# Altium PCB Brushless_driver_FOC_AbsoluteEncoder_V1.PcbDoc
Units mil, origin at the board's own origin, x right, y up, seen from the top; angles counter-clockwise.
Board outline 3400 x 2250 mil, 2 copper layers (Top Layer, Bottom Layer); 91 components, 80 nets, 374 pads, 422 vias.
Unrouted connection lines stored in the file: 70.
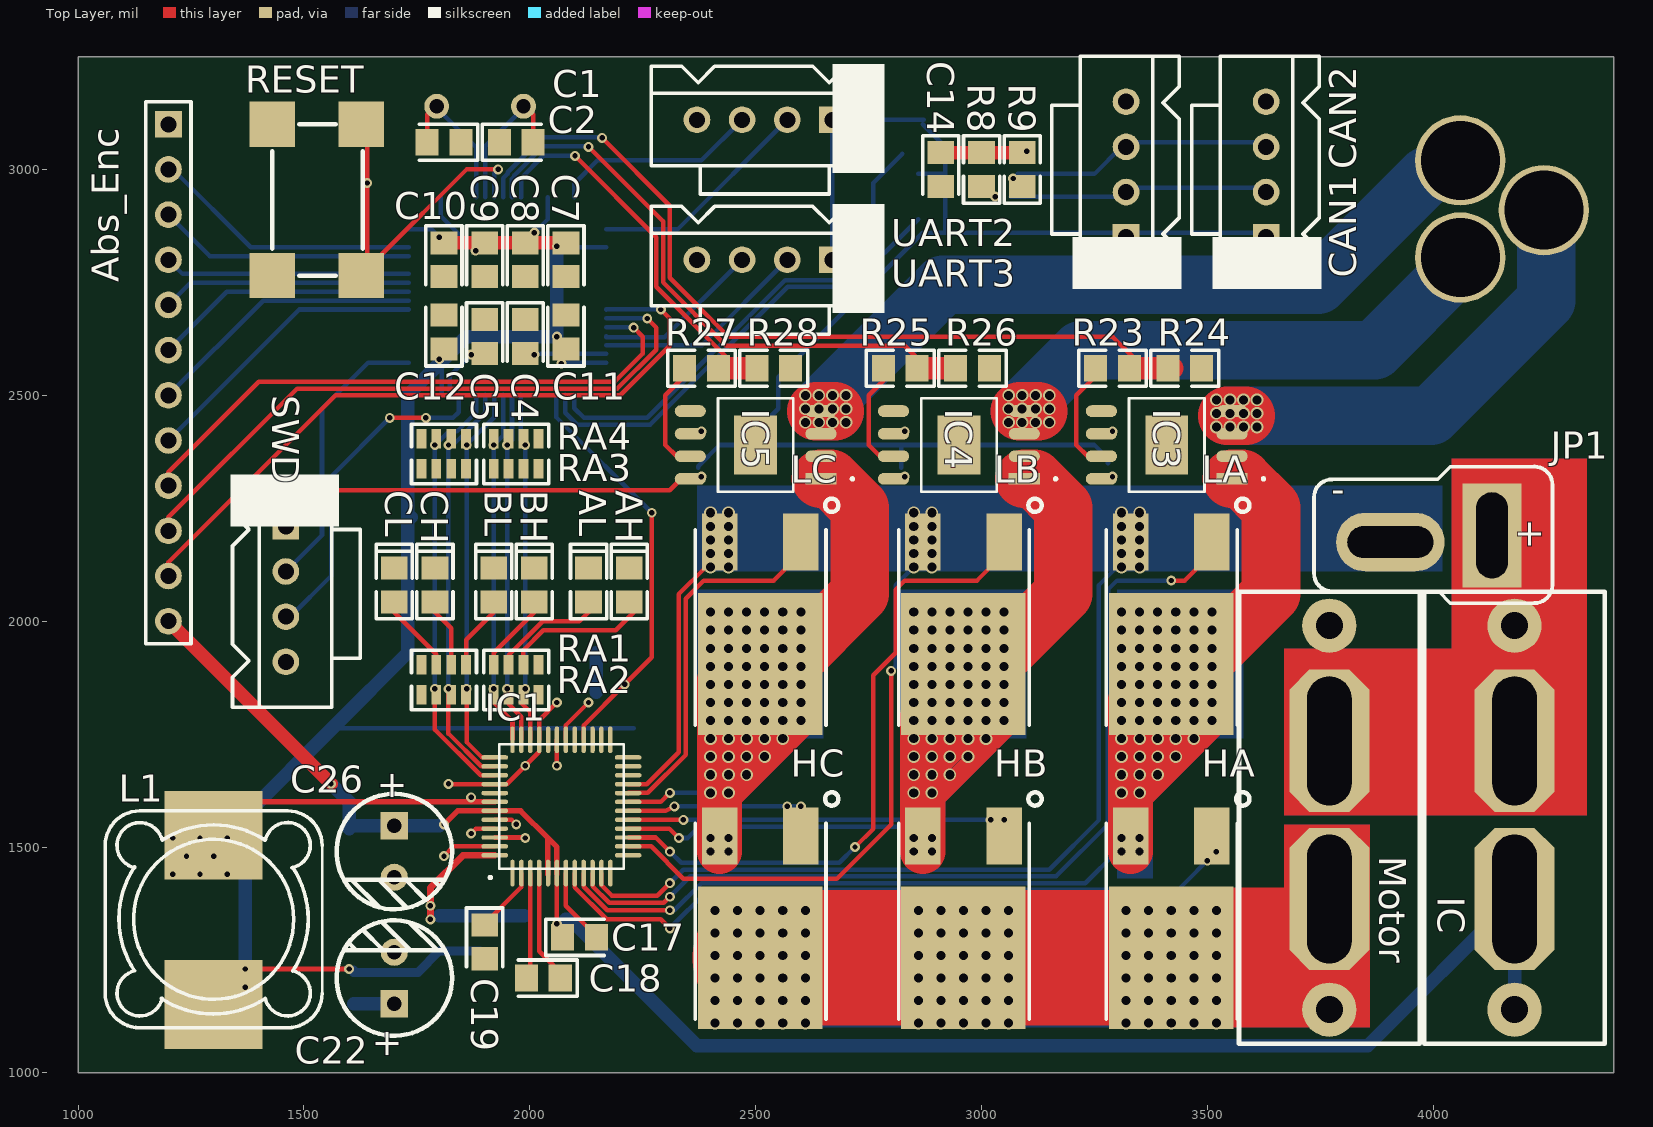
[diagram p0: Top Layer view]
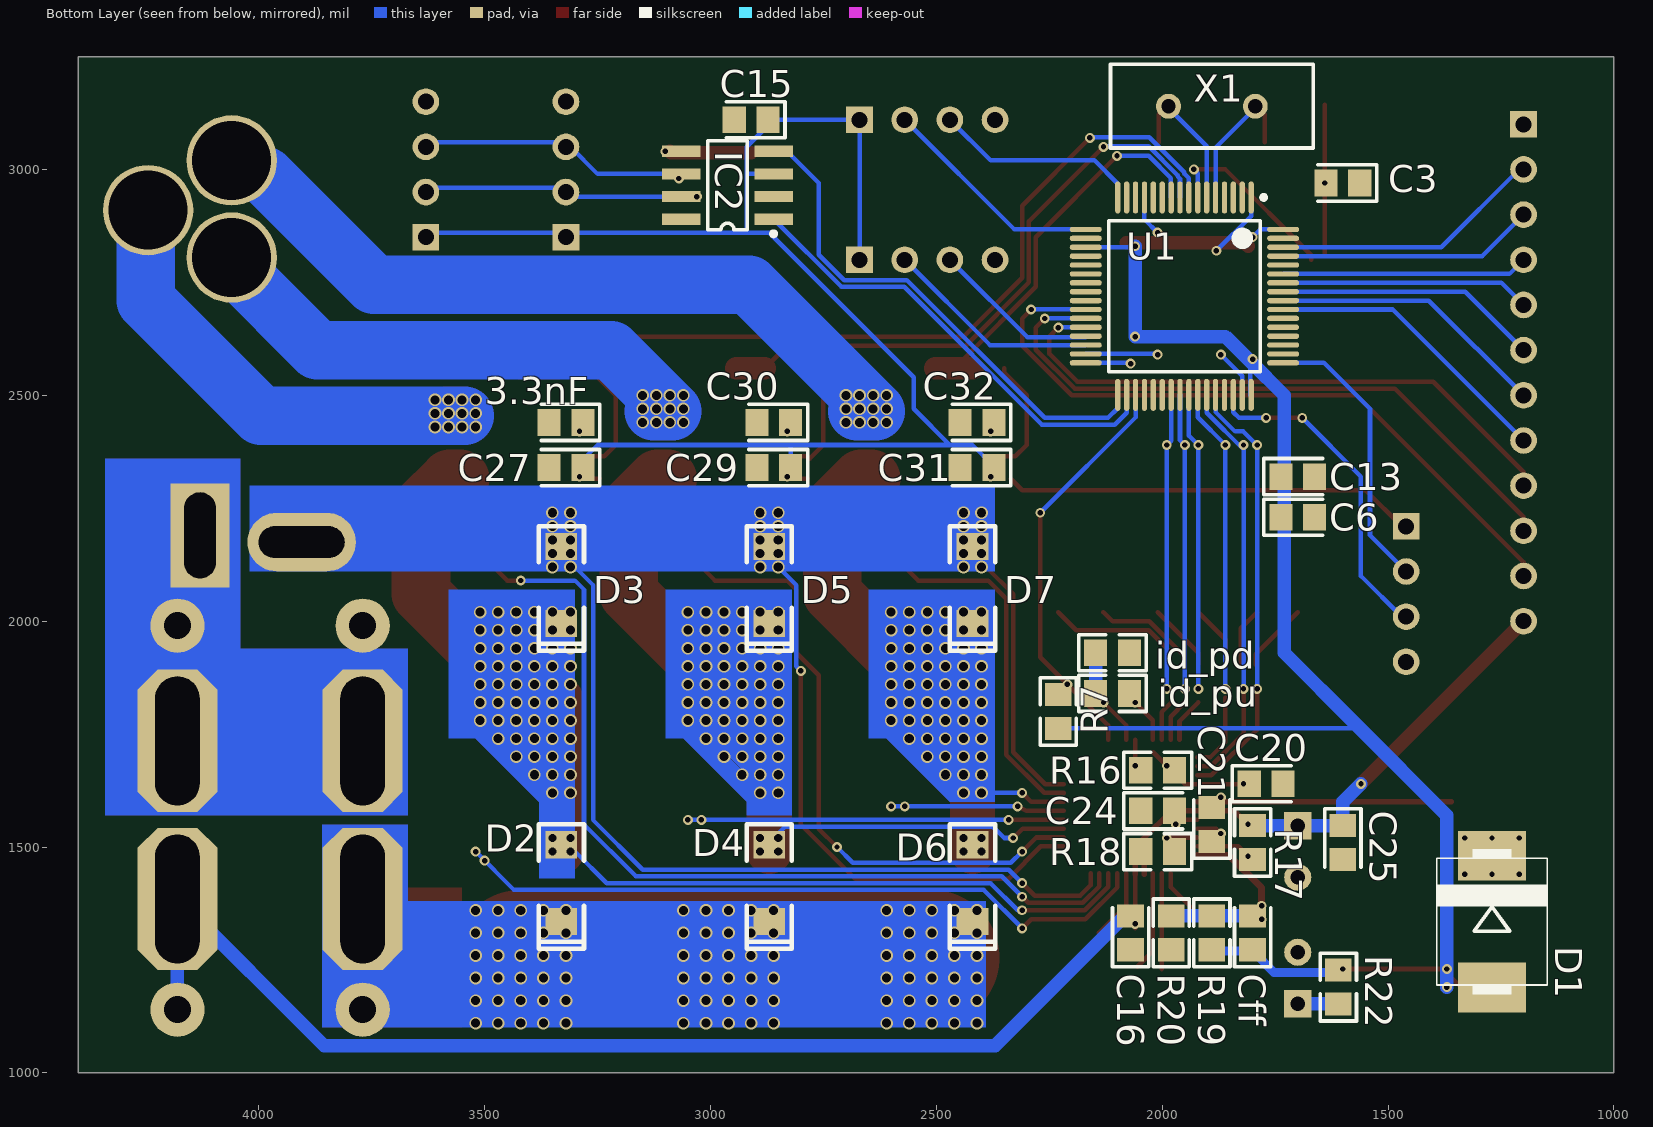
[diagram p1: Bottom Layer view, seen from below]

## Layer stack, top to bottom
Top Solder: solder mask 0.4, Solder Resist, Dk 3.5
Top Layer: signal copper 1.4
Dielectric 1: dielectric 12.6, FR-4, Dk 4.8
Bottom Layer: signal copper 1.4
Bottom Solder: solder mask 0.4, Solder Resist, Dk 3.5

## Board outline
4400,1000 4400,3250 1000,3250 1000,1000 4400,1000

## Design rules (kind name [scope] priority, off if disabled: settings)
AssemblyTestPointUsage [All] p1 off:
AssemblyTestpoint [All] p1 off: testpointundercomponent=TRUE minsize=40 maxsize=100 preferedsize=60 minholesize=0 maxholesize=40 preferedholesize=32 testpointgrid=1 usegrid=TRUE gridtolerance=0.01 allowsidetop=TRUE allowsidebottom=TRUE
Clearance [All] p1: gap=5
ComponentClearance [All] p1 off: gap=10 collisioncheckmode=3 verticalgap=10 showdistances=FALSE
DiffPairsRouting [All] p1 off: maxlimit=10 minlimit=10 mostfreqgap=10 toplayer_minwidth=15 toplayer_maxwidth=15 toplayer_prefwidth=15 bottomlayer_minwidth=15 bottomlayer_maxwidth=15 bottomlayer_prefwidth=15 maxuncoupledlength=500
FabricationTestPointUsage [All] p1 off: valid=0 allowmultiple=FALSE
FabricationTestpoint [All] p1 off: side=3 testpointundercomponent=TRUE minsize=40 maxsize=100 preferedsize=60 minholesize=0 maxholesize=40 preferedholesize=32 testpointgrid=1 allowsidetop=TRUE allowsidebottom=TRUE usegrid=TRUE gridtolerance=0.01
FanoutControl Fanout_BGA [IsBGA] p1 off: bgadir=Out bgaviamode=Centered fanoutstyle=Auto fanoutdirection=Alternating viagrid=1 // Fanout_BGA (Default Rule)
FanoutControl Fanout_LCC [IsLCC] p2 off: bgadir=Out bgaviamode=Centered fanoutstyle=Auto fanoutdirection=Alternating viagrid=1 // Fanout_LCC (Default Rule)
FanoutControl Fanout_SOIC [IsSOIC] p3 off: bgadir=Out bgaviamode=Centered fanoutstyle=Auto fanoutdirection=Alternating viagrid=1 // Fanout_SOIC (Default Rule)
FanoutControl Fanout_Small [(CompPinCount < 5)] p4 off: bgadir=Out bgaviamode=Centered fanoutstyle=Auto fanoutdirection=OutThenIn viagrid=1 // Fanout_Small (Default Rule)
FanoutControl Fanout_Default [All] p5 off: bgadir=Out bgaviamode=Centered fanoutstyle=Auto fanoutdirection=Alternating viagrid=1 // Fanout_Default (Default Rule)
Height [All] p1 off: minheight=0 maxheight=1000 prefheight=500
HoleSize [All] p1: absolutevalues=TRUE maxlimit=500 minlimit=1 maxpercent=80.000 minpercent=20.000
HoleToHoleClearance [All] p1 off: gap=10 allowstackedmicrovias=TRUE
LayerPairs [All] p1 off: enforce=TRUE
MinimumSolderMaskSliver [All] p1 off: minsoldermaskwidth=10
PasteMaskExpansion [All] p1 off: expansion=0
PolygonConnect [All] p1: connectstyle=Relief reliefconductorwidth=10 reliefentries=4 polygonreliefangle="90 Angle" airgapwidth=10
RoutingCorners [All] p1: cornerstyle=45-Degree minsetback=0 maxsetback=200
RoutingLayers [All] p1 off: top layer_v5=TRUE bottom layer_v5=TRUE
RoutingPriority [All] p1 off: routingpriority=0
RoutingTopology [All] p1 off: topology=Shortest
RoutingVias [All] p1: holewidth=28 width=50 viastyle="Through Hole" minholewidth=28 minwidth=50 maxholewidth=28 maxwidth=50
SilkToBoardRegionClearance [All] p1 off:
SilkToSilkClearance [All] p1 off: silktosilkclearance=10
SilkToSolderMaskClearance [IsPad] p1 off: minsilkscreentomaskgap=10 clearancetoexposedcopper=TRUE
SolderMaskExpansion [All] p1 off: expansion=4
UnpouredPolygon [All] p1: allowunpoured=FALSE
Width [All] p1: maxlimit=500 minlimit=10 preferedwidth=10
5 further rules are at their usual default settings.

## Components (designator, comment, footprint, x,y, rotation, side; value= is the part's Value field where it differs from the comment)
3.3nF "1nF" CC2012-0805 3320,2440 r0 bottom
Abs_Enc "" HDR1X12 1200,3100 r270 top
AH "" D0805 2220,2080 r90 top
AL "" D0805 2130,2080 r90 top
BH "" D0805 2010,2080 r90 top
BL "" D0805 1920,2080 r90 top
C1 "20pF" CC2012-0805 1810,3060 r180 top
C2 "20pF" CC2012-0805 1970,3060 r0 top
C3 "100nF" CC2012-0805 1600,2970 r0 bottom
C4 "2.2uF" CC2012-0805 1990,2630 r270 top
C5 "2.2uF" CC2012-0805 1900,2630 r270 top
C6 "2.2uF" CC2012-0805 1700,2230 r180 bottom
C7 "100nF" CC2012-0805 2080,2800 r270 top
C8 "100nF" CC2012-0805 1990,2800 r270 top
C9 "100nF" CC2012-0805 1900,2800 r270 top
C10 "100nF" CC2012-0805 1810,2800 r270 top
C11 "100nF" CC2012-0805 2080,2640 r90 top
C12 "100nF" CC2012-0805 1810,2640 r90 top
C13 "100nF" CC2012-0805 1700,2320 r180 bottom
C14 "39pF" CC2012-0805 2910,3000 r270 top
C15 "100nF" CC2012-0805 2910,3110 r0 bottom
C16 "100nF" CC2012-0805 2070,1310 r90 bottom
C17 "1uF" CC2012-0805 2110,1300 r0 top
C18 "47nF" CC2012-0805 2030,1210 r180 top
C19 "1uF" CC2012-0805 1900,1290 r270 top
C20 "1uF" CC2012-0805 1770,1640 r180 bottom
C21 "10nF" CC2012-0805 1890,1550 r90 bottom
C22 "22uF" CAPPR6.4X8 1700,1210 r90 top
C24 "470nF" CC2012-0805 2010,1580 r180 bottom
C25 "100nF" CC2012-0805 1600,1510 r270 bottom
C26 "1uF" CAPPR6.4X8 1700,1490 r270 top
C27 "100nF" CC2012-0805 3320,2340 r0 bottom
C29 "100nF" CC2012-0805 2860,2340 r0 bottom
C30 "3.3nF" CC2012-0805 2860,2440 r0 bottom
C31 "100nF" CC2012-0805 2410,2340 r0 bottom
C32 "3.3nF" CC2012-0805 2410,2440 r0 bottom
CAN1 "" LOCKEDHDR-4 3320,3000 r90 top
CAN2 "" LOCKEDHDR-4 3630,3000 r90 top
Cff ">=5nF" CC2012-0805 1800,1310 r90 bottom
CH "" D0805 1790,2080 r90 top
CL "" D0805 1700,2080 r90 top
D1 "" SMC 1270,1320 r270 bottom
D2 "" SOD-80 3330,1420 r270 bottom
D3 "" SOD-80 3330,2080 r270 bottom
D4 "" SOD-80 2870,1420 r270 bottom
D5 "" SOD-80 2870,2080 r270 bottom
D6 "" SOD-80 2420,1420 r270 bottom
D7 "" SOD-80 2420,2080 r270 bottom
HA "" TO-252AA 3420,1390 r180 top
HB "" TO-252AA 2960,1390 r180 top
HC "" TO-252AA 2510,1390 r180 top
IC "" "FUSE SOCKET" 4180,1990 r270 top
IC1 "DRV8350RH-RGZ" DRV8350RH-RGZ_footprint 2070,1590 r90 top
IC2 "TJA1050" SOP-8 2860,2890 r90 bottom
IC3 "ACS712ELCTR-30A-" SOIC-8 3410,2390 r180 top
IC4 "ACS712ELCTR-30A-" SOIC-8 2950,2390 r180 top
IC5 "ACS712ELCTR-30A-" SOIC-8 2500,2390 r180 top
id_pd "" CR2012-0805 2110,1930 r0 bottom
id_pu "" CR2012-0805 2110,1840 r0 bottom
JP1 "Battary power" T-CONNECTOR(M) 4130,2190 r180 top
L1 "220uH" MSS1260 1300,1340 r0 top
LA "" TO-252AA 3420,2040 r180 top
LB "" TO-252AA 2960,2040 r180 top
LC "" TO-252AA 2510,2040 r180 top
Motor "" "FUSE SOCKET" 3770,1990 r270 top
R7 "10k" CR2012-0805 2230,1800 r270 bottom
R8 "60" CR2012-0805 3000,3000 r90 top
R9 "60" CR2012-0805 3090,3000 r90 top
R16 "75k" CR2012-0805 2010,1670 r180 bottom
R17 "324K" CR2012-0805 1800,1510 r90 bottom
R18 "332K" CR2012-0805 2010,1490 r180 bottom
R19 "1k" CR2012-0805 1890,1310 r90 bottom
R20 "3k" CR2012-0805 1980,1310 r270 bottom
R22 "3" CR2012-0805 1610,1190 r90 bottom
R23 "2.2k" CR2012-0805 3290,2560 r0 top
R24 "6.2k" CR2012-0805 3450,2560 r180 top
R25 "2.2k" CR2012-0805 2820,2560 r0 top
R26 "6.2k" CR2012-0805 2980,2560 r180 top
R27 "2.2k" CR2012-0805 2380,2560 r0 top
R28 "6.2k" CR2012-0805 2540,2560 r180 top
RA1 "330" ARC241-0603x4 1810,1870 r270 top
RA2 "330" ARC241-0603x4 1970,1870 r270 top
RA3 "1k" ARC241-0603x4 1810,2370 r270 top
RA4 "1k" ARC241-0603x4 1970,2370 r270 top
RESET "" "PUSH SWITCH" 1430,3100 r270 top
SWD "Header 4" LOCKEDHDR-4 1460,2060 r270 top
U1 "STM32F405RGT6" LQFP64 1950,2720 r270 bottom
UART2 "Header 4" LOCKEDHDR-4 2520,3110 r180 top
UART3 "Header 4" LOCKEDHDR-4 2520,2800 r180 top
X1 "8MHz" BCY-W2/E4.7 1890,3140 r180 bottom
? "3pinOutput" 3PinPowerOutput 4060,3020 r270 top

## Footprints (in the part's own frame and the unit in brackets; to place one, negate y for a bottom-side part, rotate by r counter-clockwise, add the part's x,y. Pads: shape width x height; smd on the part's side, far side on the other; paste and mask are expansions set on the pad)
3PinPowerOutput [mil]
  round 200 hole 175: 1(110,185) 2(0,0) 3(215,0)
ARC241-0603x4 [mm] "Chip Resistor Array; Body 1.6 x 0.8 x 4 mm (LxW typ)"
  rect 1.1x0.55 smd: 1(-0.864,1.245) 2(0.838,1.245) 3(-0.864,0.406) 4(0.838,0.406) 5(-0.864,-0.432) 6(0.838,-0.432) 7(-0.864,-1.27) 8(0.838,-1.27)
  silkscreen extent -1.68,-1.83 1.68,1.83, body extent -0.79,-1.6 0.81,1.6, height 0.55
BCY-W2/E4.7 [mm]
  round 1.4 hole 0.8: 1(-2.44,-0.002) 2(2.44,-0.002)
  silkscreen extent -5.7,-2.35 5.7,2.35, body extent -5.67,-2.32 5.68,2.33, height 3.6
CAPPR6.4X8 [mil]
  rect 60x60 hole 31.5: 1(-57,0)
  round 60 hole 31.5: 2(57,0)
  silkscreen extent -128,-128 128,128
CC2012-0805 [mm] "Chip Capacitor; Body 2.0 x 1.2 mm (LxW typ)"
  rect 1.3x1.5 smd: 1(-0.95,0) 2(0.95,0)
  silkscreen extent -1.91,-1.02 1.4,1.02, body extent -0.99,-0.64 1.01,0.62, height 0.58
CR2012-0805 [mm] "Chip Resistor; Body 2.0 x 1.3 mm (LxW typ)"
  rect 1.3x1.5 smd: 1(-0.95,0) 2(0.95,0)
  silkscreen extent -1.91,-1.02 1.91,1.02, body extent -0.98,-0.63 1.02,0.63, height 0.58
D0805 [mm]
  rect 1.3x1.5 smd: 1(-0.95,0) 2(0.95,0)
  silkscreen extent -1.91,-1.02 2.3,1.02, body extent -0.98,-0.49 1.02,0.51, height 0.48
DRV8350RH-RGZ_footprint [mm]
  oval 1.5x0.25 smd paste+0 mask+0: 1(-3.75,2.75) 2(-3.75,2.25) 3(-3.75,1.75) 4(-3.75,1.25) 5(-3.75,0.75) 6(-3.75,0.25) 7(-3.75,-0.25) 8(-3.75,-0.75) 9(-3.75,-1.25) 10(-3.75,-1.75) 11(-3.75,-2.25) 12(-3.75,-2.75) 25(3.75,-2.75) 25(3.75,-2.25) 27(3.75,-1.75) 28(3.75,-1.25) 29(3.75,-0.75) 30(3.75,-0.25) 31(3.75,0.25) 32(3.75,0.75) 33(3.75,1.25) 34(3.75,1.75) 35(3.75,2.25) 36(3.75,2.75)
  oval 0.25x1.5 smd paste+0 mask+0: 13(-2.75,-3.75) 14(-2.25,-3.75) 15(-1.75,-3.75) 16(-1.25,-3.75) 17(-0.75,-3.75) 18(-0.25,-3.75) 19(0.25,-3.75) 20(0.75,-3.75) 21(1.25,-3.75) 22(1.75,-3.75) 23(2.25,-3.75) 24(2.75,-3.75) 37(2.75,3.75) 38(2.25,3.75) 39(1.75,3.75) 40(1.25,3.75) 41(0.75,3.75) 42(0.25,3.75) 43(-0.25,3.75) 44(-0.75,3.75) 45(-1.25,3.75) 46(-1.75,3.75) 47(-2.25,3.75) 48(-2.75,3.75)
  silkscreen extent -4.08,-3.5 3.5,4.08
"FUSE SOCKET" [mil]
  round 120 hole 60: 1(0,0) 2(850,0)
  oct 314.96x177.17 hole 98.43 slot 285.43 at 0 deg: 1(255,0) 2(605,0)
  silkscreen extent -75,-200 925,200, body extent 120,-66 739,128, height 664
HDR1X12 [mm] "Connector; Header; 4 Position"
  rect 1.5x1.5 hole 0.9: 1(0,0)
  round 1.5 hole 0.9: 2(2.54,0) 3(5.08,0) 4(7.62,0) 5(10.16,0) 6(12.7,0) 7(15.24,0) 8(17.78,0) 9(20.32,0) 10(22.86,0) 11(25.4,0) 12(27.94,0)
  silkscreen extent -1.27,-1.27 29.21,1.27
LOCKEDHDR-4 [mm] "5-pin header with lock"
  rect 1.5x1.5 hole 0.9: 1(-3.81,0)
  round 1.5 hole 0.9: 2(-1.27,0) 3(1.27,0) 4(3.81,0)
  silkscreen extent -6.73,-3.13 6.37,4.18, body extent -6.3,-2.63 6.3,4.37, height 1.55
LQFP64 [mm]
  oval 1.8x0.3 smd: 1(-5.537,3.731) 2(-5.537,3.231) 3(-5.537,2.731) 4(-5.537,2.231) 5(-5.537,1.731) 6(-5.537,1.231) 7(-5.537,0.731) 8(-5.537,0.231) 9(-5.537,-0.269) 10(-5.537,-0.769) 11(-5.537,-1.269) 12(-5.537,-1.769) 13(-5.537,-2.269) 14(-5.537,-2.769) 15(-5.537,-3.269) 16(-5.537,-3.769) 33(5.563,-3.769) 34(5.563,-3.269) 35(5.563,-2.769) 36(5.563,-2.269) 37(5.563,-1.769) 38(5.563,-1.269) 39(5.563,-0.769) 40(5.563,-0.269) 41(5.563,0.231) 42(5.563,0.731) 43(5.563,1.231) 44(5.563,1.731) 45(5.563,2.231) 46(5.563,2.731) 47(5.563,3.231) 48(5.563,3.731)
  oval 0.3x1.8 smd: 17(-3.737,-5.569) 18(-3.237,-5.569) 19(-2.737,-5.569) 20(-2.237,-5.569) 21(-1.737,-5.569) 22(-1.237,-5.569) 23(-0.737,-5.569) 24(-0.237,-5.569) 25(0.263,-5.569) 26(0.763,-5.569) 27(1.263,-5.569) 28(1.763,-5.569) 29(2.263,-5.569) 30(2.763,-5.569) 31(3.263,-5.569) 32(3.763,-5.569) 49(3.763,5.531) 50(3.263,5.531) 51(2.763,5.531) 52(2.263,5.531) 53(1.763,5.531) 54(1.263,5.531) 55(0.763,5.531) 56(0.263,5.531) 57(-0.237,5.531) 58(-0.737,5.531) 59(-1.237,5.531) 60(-1.737,5.531) 61(-2.237,5.531) 62(-2.737,5.531) 63(-3.237,5.531) 64(-3.737,5.531)
  silkscreen extent -5.66,-4.27 4.26,4.56, body extent -6.01,-6 5.99,6, height 1.7
MSS1260 [mm]
  rect 5.5x5 smd: 1(0.004,4.724) 2(0,-4.801)
  silkscreen extent -6.1,-6.1 6.1,6.1, body extent -6.28,-6.28 6.22,6.22, height 8
"PUSH SWITCH" [mm]
  rect 2.54x2.54 smd: 1(0,0) 1(8.5,0) 2(0,5) 2(8.5,5)
  silkscreen extent 0,0 8.51,5.08, body extent -0.68,-0.46 9.32,5.54, height 5.07
SMC [mm]
  rect 2.8x3.8 smd: 1(3.319,0) 2(-4.081,0)
  silkscreen extent -4.47,-3.11 3.71,3.1
SOD-80 [mil]
  rect 60x70 smd: 1(-85,0) 2(85,0)
  silkscreen extent -130,-50 145,50, body extent -69,-29 69,30, height 60
SOIC-8 [mil]
  rect 69x26 smd paste+0 mask+0: 1(-144.68,75)
  oval 69x26 smd paste+0 mask+0: 2(-144.68,25) 3(-144.68,-25) 4(-144.68,-75) 5(144.68,-75) 6(144.68,-25) 7(144.68,25) 8(144.68,75)
  rect 95x130 smd paste-64.5 mask+0: 9(0,0)
  silkscreen extent -217,-104 84,104, body extent -165,-99 165,99, height 69
SOP-8 [mil]
  rect 25x85 smd: 1(0,0) 2(50,0) 3(100,0) 4(150,0) 5(150,204.72) 6(100,204.72) 7(50,204.72) 8(0,204.72)
  silkscreen extent -37,-5 173,146, body extent -22,-13 171,223, height 67
T-CONNECTOR(M) [mil]
  rect 130x230 hole 70 slot 190 at 90 deg: 1(0,0)
  oval 240x130 hole 70 slot 190 at 0 deg: 2(225,15)
  silkscreen extent -134,-152 394,150, body extent -134,-155 398,152, height 598
TO-252AA [mm] "D-PAK/TO-252-AA; 3 Leads (1 Cropped); Body 10.4 (inc. leads) x 6.7 mm (LxW max)"
  rect 2x3.2 smd: 1(-2.285,-3.425) 3(2.285,-3.425)
  rect 7x8 smd: 4(0,3.425)
  silkscreen extent -4.4,-5.87 3.65,6.88

## Part data
3.3nF C1 C2 C3 C4 C5 C6 C7 C8 C9 C10 C11 C12 C13 C14 C15 C16 C17 C18 C19 C20 C21 C24 C25 C27 C29 C30 C31 C32 Cff: library part "Cap Semi", "Capacitor (Semiconductor SIM Model)"
Abs_Enc: library part "Header 12", "Header, 12-Pin"
AH AL BH BL CH CL: "Typical RED GaAs LED"
C22 C26: library part "Cap Pol DIP", "Polarized Capacitor (Radial)"
CAN1 CAN2: library part "Header 4", "Header, 4-Pin"
D1: library part "D Schottky", "Schottky Diode"
D2 D3 D4 D5 D6 D7: library part "D General", "General Purpose Diode"
HA HB HC LA LB LC: library part IRLR3705, "HEXFET N-Channel Power MOSFET"
IC: library part Fuse
IC2: "5V to 12V Charge Pump"
IC3 IC4 IC5: "Imported"
id_pd id_pu R7 R8 R9 R16 R17 R18 R19 R20 R22 R23 R24 R25 R26 R27 R28: library part "Res Semi", "Semiconductor Resistor"
JP1: library part "Header 2", "Header, 2-Pin"
L1: library part Inductor, "Inductor"
Motor: library part Fuse, "Fuse"
RA1 RA2 RA3 RA4: library part "Res Array", "4x Resistor Array"
RESET: library part SW-SPST, "Single-Pole, Single-Throw Switch"
SWD UART2 UART3: "Header, 4-Pin"
X1: library part XTAL, "Crystal Oscillator"

## Via types
v1: diameter 28, hole 20, Top Layer to Bottom Layer, 324 vias
v2: diameter 22, hole 12, Top Layer to Bottom Layer, 86 vias
v3: diameter 24, hole 18, Top Layer to Bottom Layer, 12 vias

## Nets (pads, with @x,y where several pads share a name; then routed paths per layer and width w, separated by ;. In a path a pad name is that pad's centre, name@x,y a point inside that pad or via, vN(x,y) a via of type N, cw(c..) or ccw(c..) an arc to the next point about the centre after c; other vN are vias at no path point)
3.3V: C6.1 C7.1 C8.1 C9.1 C10.1 C11.1 C12.1 C13.1 Cff.1 L1.2 R7.2 R19.1 R22.2 U1.1 U1.13 U1.19 U1.32 U1.48 U1.64 | length 4228.2
  Top Layer w10: L1.2 1379,1230 v2(1600,1230)
  Top Layer w30: C10.1@1810,2830 1817.4,2837.4 C9.1 C8.1 C7.1
  Bottom Layer w10: 1570,1770 1577.4,1762.6 R7.2 ; U1.64 1782.87,2867.13 v2(1800,2850) ; v2(1800,2580) 1804.72,2575.28 1804.72,2574.72 U1.48@1804.72,2500 ; U1.1 1803.11,2896.89 v2(1880,2820) ; v2(2010,2860) 2039.33,2889.33 U1.13 ; v2(2060,2830) 2062.24,2827.76 U1.19 ; v2@2068.15,2571.85 U1.32
  Bottom Layer w20: R22.2 1610,1222 1752,1222 1800,1270 R19.1@1890,1270
  Bottom Layer w30: v2(1370,1190) 1370,1570 1570,1770 1730,1930 1730,2222.6 C6.1 ; C6.1@1730,2230 1730,2500 1804.72,2574.72 1860,2630 v2(2060,2630) v2(2060,2830)
  other v2: 1370,1230 2070,2570
5V: C15.1 C27.1 C29.1 C31.1 CAN1.1 CAN2.1 IC2.3 IC3.8 IC4.8 IC5.8 SWD.1 UART2.1 UART3.1 | length 4169.5
  Top Layer w10: SWD.1@1470,2210 1550,2290 2310,2290 IC5.8@2335,2315 ; UART2.1@2670,3100 UART2.1@2680,3110 ; IC4.8@2785,2315 IC4.8 ; IC3.8@3245,2315 IC3.8
  Bottom Layer w10: C31.1 2372.6,2342.6 2420,2390 2470,2390 ; UART3.1@2680,2800 2670,2810 UART2.1 C15.1 ; C29.1 2822.6,2387.4 2820,2390 ; IC2.3 2920,2990 ; C15.1@2870,3100 2920,3050 2920,2990 ; 2920,2860 2920,2990 ; C27.1@3280,2350 3280,2360 3250,2390 2820,2390 ; 3290,2860 2870,2860 2550,2540 2550,2470 2470,2390 ; CAN1.1@3320,2860 CAN2.1@3630,2860 ; 2470,2390 2820,2390
  other v2: 2380,2320 2830,2320 3290,2320
12/24V: Abs_Enc.12 C16.2 C17.1 C25.1 C26.1 IC1.5 IC1.6 IC1.43 IC.2 R17.2 | length 3812.6
  Top Layer w10: C17.1@2060.16,1320.16 IC1.6
  Top Layer w12: v2(1810,1550) 1840.16,1580.16 IC1.43 1979.84,1580.16 2040,1520 ; IC1.5@2040,1440 2040,1520 ; IC1.6@2060,1440 2060,1500 2040,1520
  Top Layer w30: Abs_Enc.12@1210,2000 1210,1990 v2(1560,1640)
  Bottom Layer w30: v2(1560,1640) 1600,1600 C25.1 C25.1@1600,1540 ; C25.1@1607.4,1547.4 R17.2 ; C16.2@2080,1340 2090,1340 2370,1060 3855,1060 IC.2@4180,1385 ; IC.2@4180,1140 IC.2@4180,1230
  other v2: 2060,1330
12/24V_IN: IC.1 JP1.1 Motor.1
12/24V_MOTOR: D2.2 D4.2 D6.2 HA.4 HB.4 HC.4 Motor.2 | length 910
  Top Layer w300: HC.4 HB.4 HA.4
  other v1: 2410,1110 2460,1110 2510,1110 2560,1110 2610,1110 2860,1110 2910,1110 2960,1110 3010,1110 3060,1110 3320,1110 3370,1110 3420,1110 3470,1110 3520,1110 2410,1160 2460,1160 2510,1160 2560,1160 2610,1160 2860,1160 2910,1160 2960,1160 3010,1160 3060,1160 3320,1160 3370,1160 3420,1160 3470,1160 3520,1160 2410,1210 2460,1210 2510,1210 2560,1210 2610,1210 2860,1210 2910,1210 2960,1210 3010,1210 3060,1210 3320,1210 3370,1210 3420,1210 3470,1210 3520,1210 2410,1260 2460,1260 2510,1260 2560,1260 2610,1260 2860,1260 2910,1260 2960,1260 3010,1260 3060,1260 3320,1260 3370,1260 3420,1260 3470,1260 3520,1260 2410,1310 2460,1310 2510,1310 2560,1310 2610,1310 2860,1310 2910,1310 2960,1310 3010,1310 3060,1310 3320,1310 3370,1310 3420,1310 3470,1310 3520,1310 2410,1360 2460,1360 2510,1360 2560,1360 2610,1360 2860,1360 2910,1360 2960,1360 3010,1360 3060,1360 3320,1360 3370,1360 3420,1360 3470,1360 3520,1360
ABSOLUTEENCODER_0: Abs_Enc.11 U1.26 | length 1539.3
  Top Layer w10: Abs_Enc.11@1200,2110 1200,2130 1570,2500 2200,2500 2310,2610 2310,2670 v2(2290,2690)
  Bottom Layer w10: U1.26 2169.25,2691 2289,2691 v2(2290,2690)
ABSOLUTEENCODER_1: Abs_Enc.10 U1.27 | length 1432.7
  Top Layer w10: Abs_Enc.10 1200,2230 1485,2515 2193.79,2515 2280,2601.21 2280,2650 v2(2260,2670)
  Bottom Layer w10: U1.27 2169.25,2671 2259,2671 v2(2260,2670)
ABSOLUTEENCODER_2: Abs_Enc.9 U1.28 | length 1315.6
  Top Layer w10: Abs_Enc.9 1200,2330 1400,2530 2187.57,2530 2250,2592.43 2250,2630 v2(2230,2650)
  Bottom Layer w10: U1.28 2229.41,2650.59 v2(2230,2650)
ABSOLUTEENCODER_3: Abs_Enc.8 U1.55 | length 652.3
  Bottom Layer w10: Abs_Enc.8 1489.96,2689.96 U1.55
ABSOLUTEENCODER_4: Abs_Enc.7 U1.56 | length 619.1
  Bottom Layer w10: Abs_Enc.7 1409.65,2709.65 U1.56
ABSOLUTEENCODER_5: Abs_Enc.6 U1.57 | length 585.8
  Bottom Layer w10: Abs_Enc.6 1329.33,2729.33 U1.57
ABSOLUTEENCODER_6: Abs_Enc.5 U1.58 | length 552.5
  Bottom Layer w10: Abs_Enc.5 1249.02,2749.02 U1.58
ABSOLUTEENCODER_7: Abs_Enc.4 U1.59 | length 545.2
  Bottom Layer w10: Abs_Enc.4 1231.3,2768.7 U1.59
ABSOLUTEENCODER_8: Abs_Enc.3 U1.61 | length 556.2
  Bottom Layer w10: Abs_Enc.3@1210,2890 1291.93,2808.07 U1.61
ABSOLUTEENCODER_9: Abs_Enc.2 U1.62 | length 593.6
  Bottom Layer w10: Abs_Enc.2@1210,3000 1382.24,2827.76 U1.62
CAN1H: CAN1.2 CAN2.2 IC2.7 R8.1 | length 573.6
  Bottom Layer w10: IC2.7 3300,2940 3320,2960 CAN2.2@3630,2960
  other v2: 3030,2940
CAN1L: CAN1.3 CAN2.3 IC2.6 R9.1 | length 579
  Bottom Layer w10: v2(3070,2980) 3080,2990 3250,2990 CAN1.3@3310,3050 ; CAN1.3@3320,3060 CAN2.3@3630,3060
CAN2_RX: IC2.4 U1.33 | length 1100.3
  Bottom Layer w10: U1.33 2098.39,2471.61 2120,2450 2260,2450 2565,2755 2703.79,2755 2760,2811.21 2760,2970 IC2.4@2825,3035
CAN2_TX: IC2.1 U1.34 | length 1020.3
  Bottom Layer w10: U1.34 2078.7,2461.3 2105,2435 2266.21,2435 2571.21,2740 2710,2740 IC2.1
CURRENTSENSING_0: R23.2 R24.2 U1.8 | length 1920.5
  Top Layer w10: v2(2160,3070) 2310,2920 2310,2760 2440,2630 3290,2630 3340,2580 R24.2@3390,2580 ; R23.2@3330,2560 R23.2@3337.4,2560
  Top Layer w50: R23.2@3337.4,2560 R24.2@3422.6,2560
  Bottom Layer w10: U1.8 1940.91,2980.91 1951,2991 1951,2993.43 2028.57,3071 2159,3071 v2(2160,3070)
CURRENTSENSING_1: R25.2 R26.2 U1.9 | length 1336.9
  Top Layer w10: v2(2130,3050) 2295,2885 2295,2750 2435,2610 2830,2610 R25.2@2880,2560
  Top Layer w50: R25.2@2880,2560 R26.2
  Bottom Layer w10: U1.9 1960.59,2979.38 1966,2984.79 1966,2987.21 2029.79,3051 2129,3051 v2(2130,3050)
CURRENTSENSING_2: R27.2 R28.2 U1.10 | length 856
  Top Layer w10: v2(2100,3030) 2280,2850 2280,2740 R27.2@2440,2580
  Top Layer w50: R27.2@2420,2560 R28.2
  Bottom Layer w10: U1.10 1981,2938.72 1981,2981 2030,3030 v2(2100,3030)
CURRENTSENSINGA: D2.1 D3.2 HA.3 IC1.9 IC3.1 IC3.2 LA.4 | length 2284.6
  Top Layer w10: IC1.9 2119.21,1412 2171.21,1360 v2(2310,1360)
  Top Layer w100: HA.3@3330,1490 3330,1825.16 LA.4@3415,1910.16
  Top Layer w130: LA.4@3485.16,1905.16 3640.72,2060.72 3640.72,2250.72 3576.44,2315 IC3.1
  Bottom Layer w10: v2@2320,1360 2380,1420 3230,1420 3300,1490 D2.1@3330,1490
  other v1: 3310,1620 3350,1620 3310,1660 3350,1660 3390,1660 3310,1700 3350,1700 3390,1700 3430,1700 3310,1740 3350,1740 3390,1740 3430,1740 3470,1740 3310,1780 3350,1780 3390,1780 3430,1780 3470,1780 3510,1780 3310,1820 3350,1820 3390,1820 3430,1820 3470,1820 3510,1820 3310,1860 3350,1860 3390,1860 3430,1860 3470,1860 3510,1860 3310,1900 3350,1900 3390,1900 3430,1900 3470,1900 3510,1900 3310,1940 3350,1940 3390,1940 3430,1940 3470,1940 3510,1940 3310,1980 3350,1980 3390,1980 3430,1980 3470,1980 3510,1980 3310,2020 3350,2020 3390,2020 3430,2020 3470,2020 3510,2020
  other v3: 3310,1490 3350,1490 3310,1520 3350,1520
CURRENTSENSINGB: D4.1 D5.2 HB.3 IC1.16 IC4.1 IC4.2 LB.4 | length 1505.3
  Top Layer w10: IC1.16 2309.21,1540.79 v2(2330,1520)
  Top Layer w100: HB.3@2870.04,1490 HB.3 LB.4@2870.04,1789.96 ; LB.4 LB.4@2985.16,1905.16
  Top Layer w130: LB.4@3025.16,1905.16 3180.72,2060.72 3180.72,2250.72 3116.44,2315 IC4.1
  Bottom Layer w10: v2(2330,1520) 2350,1520 2375,1545 2835,1545 D4.1@2850,1530
  other v1: 2850,1620 2890,1620 2850,1660 2890,1660 2930,1660 2850,1700 2890,1700 2930,1700 2970,1700 2850,1740 2890,1740 2930,1740 2970,1740 3010,1740 2850,1780 2890,1780 2930,1780 2970,1780 3010,1780 3050,1780 2850,1820 2890,1820 2930,1820 2970,1820 3010,1820 3050,1820 2850,1860 2890,1860 2930,1860 2970,1860 3010,1860 3050,1860 2850,1900 2890,1900 2930,1900 2970,1900 3010,1900 3050,1900 2850,1940 2890,1940 2930,1940 2970,1940 3010,1940 3050,1940 2850,1980 2890,1980 2930,1980 2970,1980 3010,1980 3050,1980 2850,2020 2890,2020 2930,2020 2970,2020 3010,2020 3050,2020
  other v3: 2850,1490 2890,1490 2850,1520 2890,1520
CURRENTSENSINGC: D6.1 D7.2 HC.3 IC1.19 IC5.1 IC5.2 LC.4 | length 1093.4
  Top Layer w10: IC1.19 2289.84,1599.84 v2(2310,1620)
  Top Layer w100: HC.3@2420,1490 2420.04,1490.04 HC.3 2420,1524.88 LC.4@2420,1870
  Top Layer w130: LC.4@2575.16,1905.16 2730.72,2060.72 2730.72,2250.72 2666.44,2315 IC5.1
  Bottom Layer w10: v2(2310,1620) v1(2400,1620)
  other v1: 2440,1620 2400,1660 2440,1660 2480,1660 2400,1700 2440,1700 2480,1700 2520,1700 2400,1740 2440,1740 2480,1740 2520,1740 2560,1740 2400,1780 2440,1780 2480,1780 2520,1780 2560,1780 2600,1780 2400,1820 2440,1820 2480,1820 2520,1820 2560,1820 2600,1820 2400,1860 2440,1860 2480,1860 2520,1860 2560,1860 2600,1860 2400,1900 2440,1900 2480,1900 2520,1900 2560,1900 2600,1900 2400,1940 2440,1940 2480,1940 2520,1940 2560,1940 2600,1940 2400,1980 2440,1980 2480,1980 2520,1980 2560,1980 2600,1980 2400,2020 2440,2020 2480,2020 2520,2020 2560,2020 2600,2020
  other v3: 2400,1490 2440,1490 2400,1520 2440,1520
DVDD: C20.1 IC1.33 IC1.40 id_pu.1 R16.2 | length 327.1
  Top Layer w10: v2@1820.79,1639.21 IC1.40 1949.21,1639.21 IC1.33@2020,1710 ; IC1.33 2020.79,1780.79 v2(2060,1820)
  other v2: 1820,1640 1990,1680
GHA: HA.1 IC1.8 | length 1560.3
  Top Layer w10: IC1.8 2099.53,1410.47 2170,1340 2290,1340 v2(2310,1320)
  Bottom Layer w10: v2(2310,1320) 2395,1405 3435,1405 v2(3520,1490)
  other v2: 3500,1470
GHB: HB.1 IC1.17 | length 832.6
  Top Layer w10: IC1.17 2339.53,1560.47 v2(2340,1560)
  Bottom Layer w10: v2(2340,1560) v2(3050,1560)
  other v2: 3020,1560
GHC: HC.1 IC1.18 | length 384.7
  Top Layer w10: IC1.18 2300.16,1580.16 v2(2320,1590)
  Bottom Layer w10: v2(2320,1590) v2(2600,1590)
  other v2: 2570,1590
GLA: IC1.10 LA.1 | length 2001.7
  Top Layer w10: IC1.10 2138.9,1413.53 2175.61,1376.82 2296.82,1376.82 v2(2310,1390) ; v2(3420,2090) 3450,2090 LA.1@3490,2130
  Bottom Layer w10: v2(2310,1390) 2355,1435 3165,1435 3280,1550 3280,2070 3300,2090 v2@3410,2090
GLB: IC1.15 LB.1 | length 1391.5
  Top Layer w10: IC1.15 2278.9,1521.1 v2(2310,1490) ; v2(2720,1500) 2760,1540 2760,1880 2810,1930 2810,2070 2830,2090 2990,2090 LB.1@3030,2130
  Bottom Layer w10: v2(2310,1490) 2335,1465 2370.15,1465 ; 2370.86,1465 2685,1465 v2(2720,1500)
GLC: IC1.20 LC.1 | length 790.5
  Top Layer w10: IC1.20 2218.11,1620 2261.21,1620 2345,1703.79 2345,2049.58 2385.42,2090 2540,2090 LC.1@2590,2140
GND: 3.3nF.2 Abs_Enc.1 AH.2 AL.2 BH.2 BL.2 C1.1 C2.1 C3.1 C4.1 C5.1 C6.2 C7.2 C8.2 C9.2 C10.2 C11.2 C12.2 C13.2 C14.2 C15.2 C16.1 C19.2 C20.2 C22.2 C24.1 C25.2 C26.2 C27.2 C29.2 C30.2 C31.2 C32.2 CAN1.4 CAN2.4 CH.2 CL.2 D1.1 D3.1 D5.1 D7.1 IC1.1 IC1.11 IC1.14 IC1.21 IC1.27 IC1.29 IC1.41 IC2.2 IC2.8 IC3.5 IC4.5 IC5.5 id_pd.1 JP1.2 LA.3 LB.3 LC.3 R18.1 R20.2 R24.1 R26.1 R28.1 RA3.2 RA3.4 RA3.6 RA3.8 RA4.2 RA4.4 RA4.6 RA4.8 RESET.1 SWD.4 U1.12 U1.18 U1.60 U1.63 UART2.4 UART3.4 | length 3708.3
  Top Layer w10: IC1.11 2158.58,1415.06 2181.82,1391.82 2281.82,1391.82 v2(2310,1420) ; IC1.14 2268.58,1501.42 2340,1430 2680,1430 2800,1550 v2(2800,1890) ; IC1.21 2259.21,1639.21 2330,1710 2330,2060 LC.3@2390,2120
  Bottom Layer w10: v2(2310,1420) 2340,1450 3150,1450 3260,1560 3260,2080 3330,2150 D3.1@3340,2150 ; v2(2800,1890) 2810,1900 2810,2080 D5.1@2880,2150
  other v1: 2400,2120 2440,2120 2850,2120 2890,2120 3310,2120 3350,2120 2400,2150 2440,2150 2850,2150 2890,2150 3310,2150 3350,2150 2400,2180 2440,2180 2850,2180 2890,2180 3310,2180 3350,2180 2400,2210 2440,2210 2850,2210 2890,2210 3310,2210 3350,2210 2400,2240 2440,2240 2850,2240 2890,2240 3310,2240 3350,2240
INHA: IC1.34 RA2.4 RA4.3 U1.39 | length 746.1
  Top Layer w10: RA2.4@1980,1820 2001.1,1798.9 IC1.34
  Bottom Layer w10: U1.39 1980.28,2399.72 v2(1990,2390) v2(1990,1850)
INHB: IC1.36 RA2.8 RA4.7 U1.41 | length 759.3
  Top Layer w10: RA2.8@1920,1820 1961.73,1778.27 IC1.36
  Bottom Layer w10: v2(1920,1850) v2(1920,2390) 1940.91,2410.91 U1.41
INHC: IC1.38 RA1.4 RA3.3 U1.43 | length 926
  Top Layer w10: v2(1820,1850) 1820,1751.21 1892.63,1678.58 IC1.38
  Bottom Layer w10: v2(1820,1850) v2@1820,2380 ; v2(1820,2390) v2@1820,2380 ; U1.43 1901.54,2461.54 v2@1820,2380
INLA: IC1.35 RA2.6 RA4.5 U1.40 | length 750.7
  Top Layer w10: RA2.6@1950,1820 1981.42,1788.58 IC1.35
  Bottom Layer w10: v2(1950,1850) v2(1950,2390) 1960.59,2400.59 U1.40
INLB: IC1.37 RA1.2 RA3.1 U1.42 | length 850.4
  Top Layer w10: RA1.2@1860,1830 1860,1732.43 1894.16,1698.27 IC1.37
  Bottom Layer w10: v2(1860,1850) v2(1860,2390) 1921.22,2451.22 U1.42
INLC: IC1.39 RA1.6 RA3.5 U1.44 | length 954.1
  Top Layer w10: RA1.6@1790,1840 1790,1760 1891.1,1658.9 IC1.39
  Bottom Layer w10: v2(1790,1850) 1790,2389.7 1820.3,2420 1838.79,2420 1881.85,2463.06 U1.44
  other v2: 1790,2390
Net3.3nF_1: 3.3nF.1 IC3.6
  other v2: 3290,2420
NetAH_1: AH.1 RA2.3 | length 310.8
  Top Layer w10: RA2.3 1986,1936 2030,1980 2190,1980 AH.1@2230,2020
NetAL_1: AL.1 RA2.5 | length 236.9
  Top Layer w10: RA2.5 1953,1924.21 2028.79,2000 2110,2000 AL.1@2130,2020
NetBH_1: BH.1 RA2.7 | length 153.3
  Top Layer w10: RA2.7 1920,1930 BH.1@2010,2020
NetBL_1: BL.1 RA1.1 | length 141.3
  Top Layer w10: RA1.1 1859,1959 BL.1@1920,2020
NetC1_2: C1.2 U1.5 X1.2 | length 313.1
  Top Layer w10: C1.2 1772.6,3122.6 X1.2@1790,3140
  Bottom Layer w10: X1.2@1800,3130 1881.85,3048.15 U1.5
NetC2_2: C2.2 U1.6 X1.1 | length 324.3
  Top Layer w10: X1.1@1990,3140 2007.4,3122.6 C2.2 ; X1.1@1990,3150 X1.1@2002.6,3150
  Bottom Layer w10: U1.6 1901.54,3051.54 X1.1@1980,3130
NetC3_2: C3.2 RESET.2 U1.7 | length 747.5
  Top Layer w10: RESET.2@1640,2810 v2(1640,2970) RESET.2@1640,3143.15 ; RESET.2@1670,2800 1670,2810 1860,3000 v2(1930,3000)
  Bottom Layer w10: U1.7 1921.22,2991.22 v2(1930,3000)
NetC4_2: C4.2 U1.31 | length 157.7
  Bottom Layer w10: v2@2011.54,2591.54 U1.31
  other v2: 2010,2590
NetC5_2: C5.2 U1.47 | length 108.6
  Bottom Layer w10: U1.47 1822.8,2542.8 v2(1870,2590)
NetC14_1: C14.1 IC2.5 R8.2 R9.2 | length 181.1
  Top Layer w30: C14.1 3087.4,3037.4 R9.2@3090,3040
  other v2: 3100,3040
NetC17_2: C17.2 IC1.7 | length 157.3
  Top Layer w10: IC1.7 2079.84,1370.16 C17.2@2140,1310
NetC18_1: C18.1 IC1.4 | length 221.5
  Top Layer w10: IC1.4 2020.79,1269.21 C18.1@2055,1235
NetC18_2: C18.2 IC1.3 | length 212.4
  Top Layer w10: C18.2@2001.1,1230 IC1.3
NetC19_1: C19.1 IC1.2 | length 146.1
  Top Layer w10: C19.1@1900,1330 1981.42,1411.42 IC1.2
NetC21_1: C21.1 IC1.45 | length 56.8
  Top Layer w10: v2(1870,1530) 1880.79,1540.79 IC1.45
NetC21_2: C21.2 D1.2 IC1.42 L1.1 | length 563.4
  Top Layer w10: IC1.42 IC1.42@1922.36,1601
  Top Layer w12: L1.1@1360.16,1599.84 IC1.42
  other v2: 1210,1440 1270,1440 1330,1440 1240,1480 1300,1480 1210,1520 1270,1520 1330,1520 1870,1610
NetC22_1: C22.1 R22.1 | length 97.4
  Bottom Layer w30: R22.1 C22.1@1707.4,1152.6
NetC24_2: C24.2 IC1.44 | length 52
  Top Layer w10: IC1.44 1959.53,1560.47 v2(1970,1550)
NetC30_1: C30.1 IC4.6
  other v2: 2830,2420
NetC32_1: C32.1 IC5.6
  other v2: 2380,2420
NetCff_2: Cff.2 IC1.48 R19.2 R20.1 | length 429.5
  Top Layer w15: v2(1780,1340) 1780,1410 1851.73,1481.73 IC1.48
  Bottom Layer w30: Cff.2 R19.2 R20.1@1987.4,1347.4
  other v2: 1780,1370
NetCH_1: CH.1 RA1.3 | length 130.9
  Top Layer w10: CH.1@1790,2020 1826,1984 RA1.3
NetCL_1: CL.1 RA1.5 | length 154.5
  Top Layer w10: CL.1@1700,2020 1793,1927 RA1.5
NetIC1_30: IC1.30 id_pd.2 id_pu.2 | length 190.5
  Top Layer w10: IC1.30 2080,1737.8 2080,1770 v2(2130,1820)
  Bottom Layer w30: id_pu.2@2147.4,1842.6 id_pd.2
NetIC1_31: IC1.31 R16.1 | length 57.5
  Top Layer w10: v2@2060.16,1680.16 IC1.31
  other v2: 2060,1680
NetIC1_46: IC1.46 R18.2 | length 67.6
  Top Layer w10: IC1.46 v2@1990,1521.1
  other v2: 1990,1520
NetIC1_47: IC1.47 R17.1 | length 121.2
  Top Layer w10: v2(1810,1480) 1831.42,1501.42 IC1.47
NetIC3_7: IC3.7 R23.1 | length 271.9
  Top Layer w10: R23.1@3250,2560 3250,2540 3210,2500 3210,2390 3235,2365 IC3.7 IC3.7@3285,2365
NetIC4_7: IC4.7 R25.1 | length 229.3
  Top Layer w10: IC4.7@2780,2360 2750,2390 2750,2500 R25.1@2790,2540 ; IC4.7@2785,2365 IC4.7
NetIC5_7: IC5.7 R27.1 | length 256.4
  Top Layer w10: R27.1@2350,2560 2350,2550 2300,2500 2300,2390 2325,2365 IC5.7
NFAULT: IC1.28 R7.1 U1.35 | length 913.2
  Top Layer w10: IC1.28 2119.21,1769.21 v2(2210,1860) 2270,1920 v2(2270,2240)
  Bottom Layer w10: U1.35 2059.02,2450.98 v2(2270,2240)
PHASEA: ?.1 IC3.3 IC3.4 | length 1011.3
  Top Layer w130: IC3.4@3544.68,2455 v1@3585,2455
  Bottom Layer w130: v1@3544.68,2455 3995,2455 4250,2710 ?.1@4250,2870
  other v1: 3520,2430 3550,2430 3580,2430 3610,2430 3520,2460 3550,2460 3580,2460 3610,2460 3520,2490 3550,2490 3580,2490 3610,2490
PHASEB: ?.3 IC4.3 IC4.4 | length 1176.4
  Top Layer w130: IC4.4@3084.68,2465 IC4.4 IC4.4@3125,2465
  Bottom Layer w130: v1@3125,2465 3084.68,2465 3219.68,2600 3870,2600 ?.3@4050,2780
  other v1: 3060,2440 3090,2440 3120,2440 3150,2440 3060,2470 3090,2470 3120,2470 3150,2470 3060,2500 3090,2500 3120,2500 3150,2500
PHASEC: ?.2 IC5.3 IC5.4 | length 1646.3
  Top Layer w130: IC5.4@2634.68,2465 IC5.4 IC5.4@2675,2465
  Bottom Layer w130: v1@2675,2465 2634.68,2465 2914.68,2745 3745,2745 ?.2@3985,2985
  other v1: 2610,2440 2640,2440 2670,2440 2700,2440 2610,2470 2640,2470 2670,2470 2700,2470 2610,2500 2640,2500 2670,2500 2700,2500
SWCLK: SWD.2 U1.49 | length 627.6
  Bottom Layer w10: SWD.2 1540,2190 1540,2470 1641.85,2571.85 U1.49
SWDIO: SWD.3 U1.46 | length 727.3
  Top Layer w10: v2(1690,2450) v2(1770,2450)
  Bottom Layer w10: SWD.3@1470,2010 1560,2100 1560,2320 v2(1690,2450) ; v2(1770,2450) 1830,2450 1842.48,2462.48 U1.46
UART2_RX: U1.17 UART2.2 | length 501.3
  Bottom Layer w10: U1.17 2327.13,2867.13 UART2.2
UART2_TX: U1.16 UART2.3 | length 460.7
  Bottom Layer w10: U1.16 2098.39,2968.39 2150,3020 2380,3020 UART2.3
UART3_RX: U1.30 UART3.2 | length 478.9
  Bottom Layer w10: U1.30 2381.22,2611.22 UART3.2
UART3_TX: U1.29 UART3.3 | length 359.3
  Bottom Layer w10: U1.29 2169.25,2629 2299,2629 UART3.3@2460,2790
pads on no net: IC1.12 IC1.13 IC1.22 IC1.23 IC1.24 IC1.25 IC1.32 IC3.9 IC4.9 IC5.9 RA1.7 RA1.8 RA2.1 RA2.2 RA3.7 RA4.1 U1.2 U1.3 U1.4 U1.11 U1.14 U1.15 U1.20 U1.21 U1.22 U1.23 U1.24 U1.25 U1.36 U1.37 U1.38 U1.45 U1.50 U1.51 U1.52 U1.53 U1.54

## Other copper
Top Layer:
  region net CURRENTSENSINGA: 3380,1660 3470,1750 3425,1795 3335,1705
  region net CURRENTSENSINGA: 3380,1600 3540,1760 3510,1790 3350,1630
  region net CURRENTSENSINGB: 2920,1660 3010,1750 2965,1795 2875,1705
  region net CURRENTSENSINGB: 2920,1600 3080,1760 3050,1790 2890,1630
  region net CURRENTSENSINGC: 2470,1660 2560,1750 2515,1795 2425,1705
  region net CURRENTSENSINGC: 2470,1600 2630,1760 2600,1790 2440,1630
  rectangle net 12/24V_IN: 3670,1570 4280,1940
  rectangle net 12/24V_IN: 4040,1570 4340,2360
  rectangle net 12/24V_MOTOR: 3670,1100 3860,1550
  rectangle net 12/24V_MOTOR: 3550,1100 3860,1410
Bottom Layer:
  region net CURRENTSENSINGA: 3380,1660 3470,1750 3425,1795 3335,1705
  region net CURRENTSENSINGA: 3380,1600 3540,1760 3510,1790 3350,1630
  region net CURRENTSENSINGB: 2920,1660 3010,1750 2965,1795 2875,1705
  region net CURRENTSENSINGB: 2920,1600 3080,1760 3050,1790 2890,1630
  region net CURRENTSENSINGC: 2470,1660 2560,1750 2515,1795 2425,1705
  region net CURRENTSENSINGC: 2470,1600 2630,1760 2600,1790 2440,1630
  rectangle net GND: 2370,2110 4020,2300
  rectangle net 12/24V_IN: 3670,1570 4280,1940
  rectangle net 12/24V_IN: 4040,1570 4340,2360
  rectangle net 12/24V_MOTOR: 2390,1100 3670,1380
  rectangle net 12/24V_MOTOR: 3670,1100 3860,1550
  rectangle net CURRENTSENSINGC: 2370,1600 2470,1740
  rectangle net CURRENTSENSINGB: 2820,1570 2920,1750
  rectangle net CURRENTSENSINGA: 3300,1430 3380,1740
  rectangle net CURRENTSENSINGA: 3300,1740 3580,2070
  rectangle net CURRENTSENSINGB: 2820,1740 3100,2070
  rectangle net CURRENTSENSINGC: 2370,1740 2650,2070

## Silkscreen, mask and mechanical layers (free items; w line width, h text height)
Top Solder:
  region: 3380,1660 3470,1750 3425,1795 3335,1705
  region: 3380,1600 3540,1760 3510,1790 3350,1630
  region: 2920,1660 3010,1750 2965,1795 2875,1705
  region: 2920,1600 3080,1760 3050,1790 2890,1630
  region: 2470,1660 2560,1750 2515,1795 2425,1705
  region: 2470,1600 2630,1760 2600,1790 2440,1630
  rectangle: 3670,1570 4280,1940
  rectangle: 4040,1840 4340,2360
  rectangle: 3670,1100 3860,1550
  rectangle: 2370,1100 3670,1410
  rectangle: 3280,1460 3380,1750
  rectangle: 2820,1460 2920,1750
  rectangle: 2370,1460 2470,1760
  lines w130: 2575.16,1905.16 2730.72,2060.72 2730.72,2250.72 2666.44,2315 2644.68,2315 ; 3025.16,1905.16 3180.72,2060.72 3180.72,2250.72 3116.44,2315 3094.68,2315 ; 3485.16,1905.16 3640.72,2060.72 3640.72,2250.72 3576.44,2315 3554.68,2315
Bottom Solder:
  region: 3380,1600 3540,1760 3510,1790 3350,1630
  region: 3380,1660 3470,1750 3425,1795 3335,1705
  region: 2920,1600 3080,1760 3050,1790 2890,1630
  region: 2920,1660 3010,1750 2965,1795 2875,1705
  region: 2470,1660 2560,1750 2515,1795 2425,1705
  region: 2470,1600 2630,1760 2600,1790 2440,1630
  rectangle: 3670,1100 3860,1550
  rectangle: 2370,2110 4020,2300
  rectangle: 3670,1570 4280,1940
  rectangle: 4040,1570 4340,2360
  rectangle: 2390,1100 3670,1380
  rectangle: 2370,1600 2470,1740
  rectangle: 2820,1570 2920,1750
  rectangle: 3300,1430 3380,1740
  rectangle: 3300,1740 3580,2070
  rectangle: 2820,1740 3100,2070
  rectangle: 2370,1740 2650,2070
  lines w130: 2675,2465 2635,2465 2915,2745 3745,2745 3985,2985 ; 3125,2465 3084.68,2465 3219.68,2600 3870,2600 4050,2780 ; 3544.68,2455 3995,2455 4250,2710 4250,2870

## Text inside footprints (layer, text, board x,y; h text height)
C22: Top Overlay "+" at 1710,1030 h60 r90
C26: Top Overlay "+" at 1670,1670 h60 r270
JP1: Top Overlay "-" at 3804,2308 h60 r180; Top Overlay "+" at 4248,2218 h60 r180